# Altium PCB FlexiGlow_Rev_A.PcbDoc
Units mm, origin at the board's own origin, x right, y up, seen from the top; angles counter-clockwise.
Board outline 31.38 x 28.52 mm, 2 copper layers (Top Layer, Bottom Layer), stack 0.252 mm thick; 46 components, 33 nets, 142 pads, 73 vias.
Unrouted connection lines stored in the file: 4.
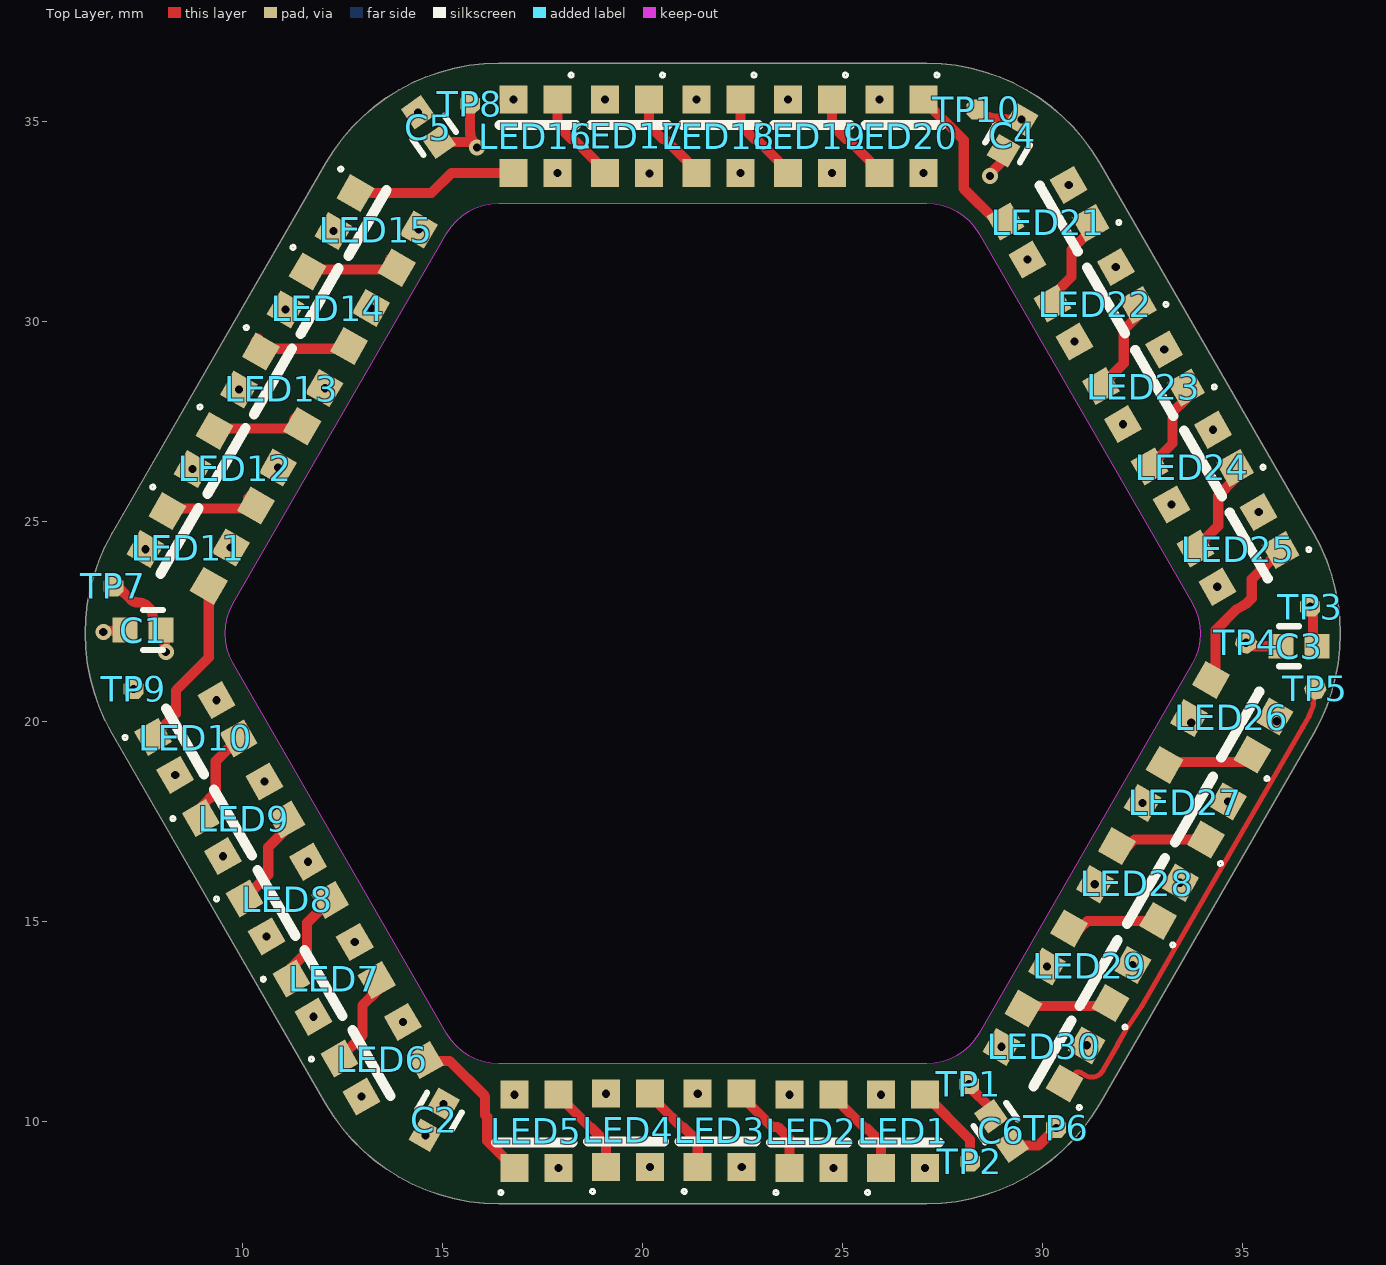
[diagram p0: Top Layer view]
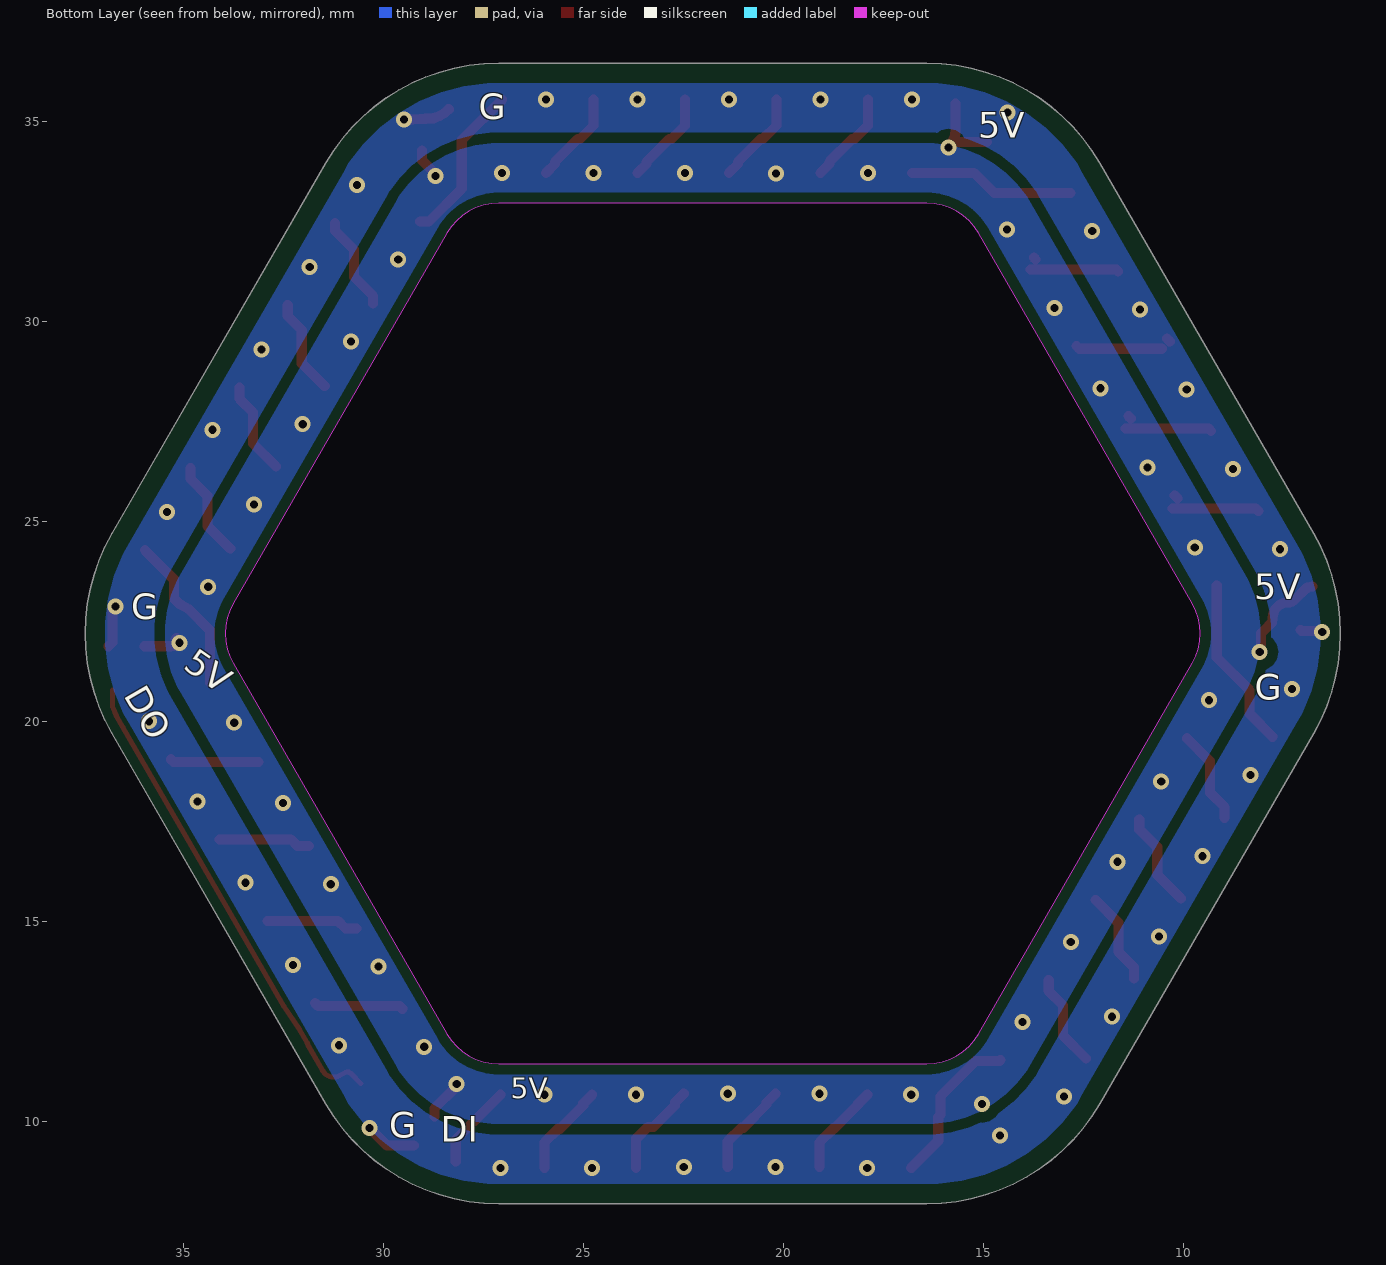
[diagram p1: Bottom Layer view, seen from below]
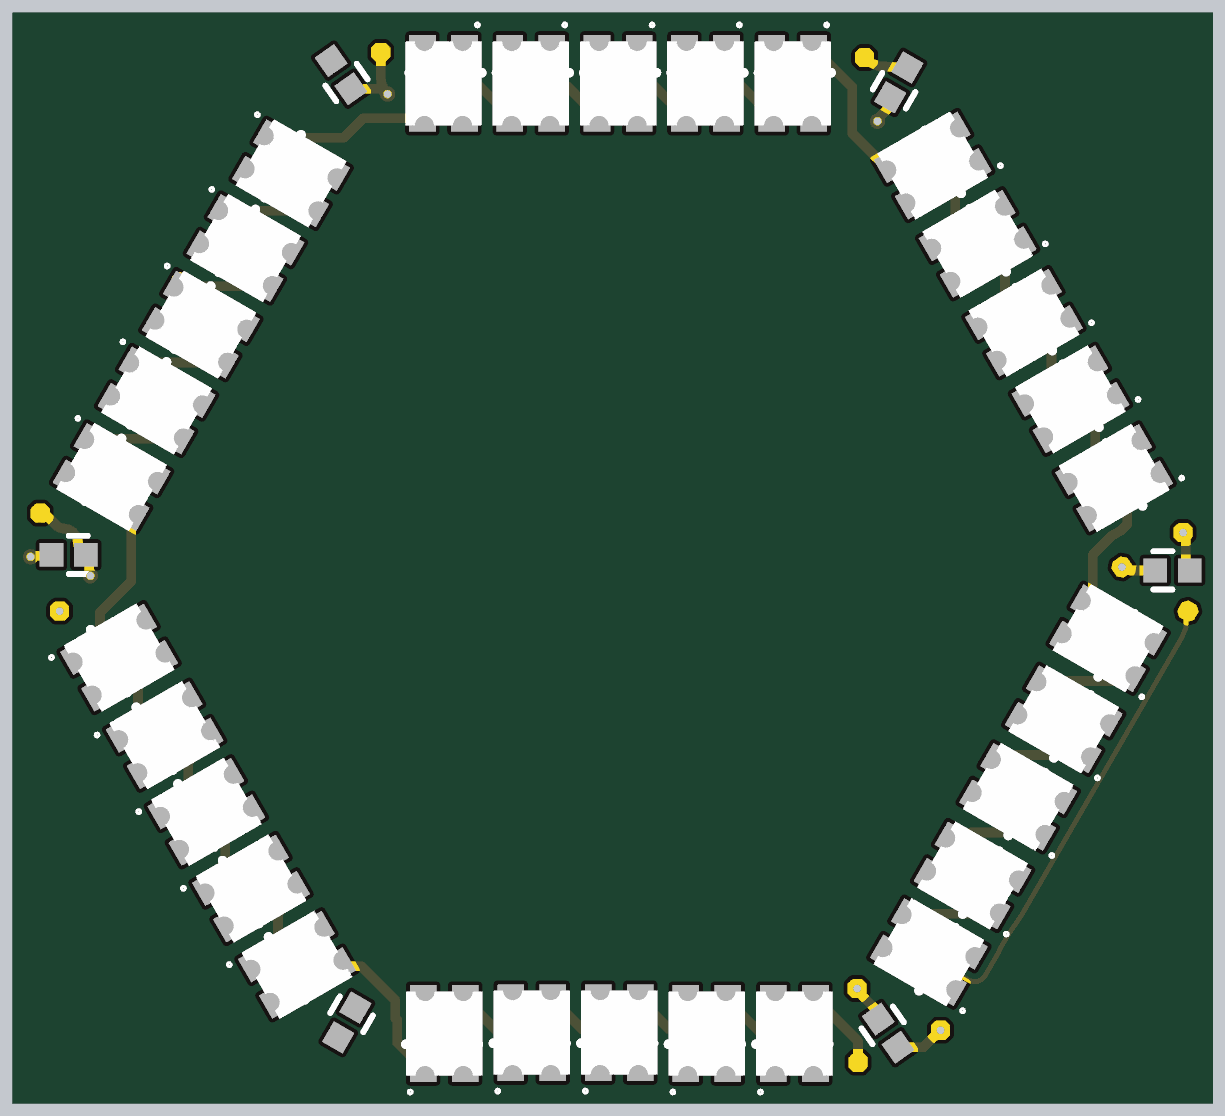
[diagram p2: 3D render of the assembled board from above, using the file's embedded part models]

## Layer stack, top to bottom
Top Coverlay: solder mask 0.0254, SM-002, Dk 4
Adhesive 1: prepreg 0.0254, PP-006, Dk 4.1
Top Layer: signal copper 0.018
Adhesive 2: prepreg 0.02, PP-006, Dk 4.1
PI  1: prepreg 0.025, Composite dielectric, Dk 4.1
Adhesive 3: prepreg 0.02, PP-006, Dk 4.1
Bottom Layer: signal copper 0.018
Adhesive 4: prepreg 0.0254, PP-006, Dk 4.1
Bottom Solder: solder mask 0.0254, SM-002, Dk 4
Stiffener 1: core 0.1, Core-009, Dk 4.5

## Board outline
6.747,19.689 cw(c11.077,22.189) 6.747,24.689 12.092,33.948 cw(c16.422,31.448) 16.422,36.448 27.113,36.448 cw(c27.113,31.448) 31.443,33.948 36.788,24.689 cw(c32.458,22.189) 36.788,19.689 31.443,10.431 cw(c27.113,12.931) 27.113,7.931 16.422,7.931 cw(c16.422,12.931) 12.092,10.431
cut-out: 9.778,21.439 cw(c11.077,22.189) 9.778,22.939 15.123,32.198 cw(c16.422,31.448) 16.422,32.948 27.113,32.948 cw(c27.113,31.448) 28.412,32.198 33.757,22.939 cw(c32.458,22.189) 33.757,21.439 28.412,12.181 cw(c27.113,12.931) 27.113,11.431 16.422,11.431 cw(c16.422,12.931) 15.123,12.181

## Design rules (kind name [scope] priority, off if disabled: settings)
BoardOutlineClearance [All] p1: gap=0.25 ignorepadtopadclearanceinfootprint=FALSE
Clearance [All] p1: gap=0.254 ignorepadtopadclearanceinfootprint=FALSE except(0: Arc-Hole Track-Hole SMDPad-Hole THPad-Hole Via-Hole Fill-Hole Poly-Hole Region-Hole Text-Hole)
HoleSize [IsVia] p1: absolutevalues=TRUE maxlimit=2.54 minlimit=0.2 maxpercent=80.000 minpercent=20.000
HoleToHoleClearance [All] p1: gap=0.1 allowstackedmicrovias=TRUE
PolygonConnect [All] p1: connectstyle=Direct reliefconductorwidth=0.254 reliefentries=4 polygonreliefangle="90 Angle" airgapwidth=0.254
RoutingVias [All] p1: holewidth=0.711 width=1.27 viastyle="Through Hole" minholewidth=0.203 minwidth=0.305 maxholewidth=0.711 maxwidth=1.27
SilkToSolderMaskClearance [IsPad] p1: minsilkscreentomaskgap=0 clearancetoexposedcopper=TRUE
SolderMaskExpansion [All] p1: expansion=0.102 istentingtop=FALSE
SupplyNets "Schematic Supply Nets_1" [InNet('GND')] p1: voltage=0.000
SupplyNets "Schematic Supply Nets" [InNet('5V')] p2: voltage=0.000
Width [All] p1: maxlimit=2.54 minlimit=0.076 preferedwidth=0.254
27 further rules are at their usual default settings.

## Components (designator, comment, footprint, x,y, rotation, side; value= is the part's Value field where it differs from the comment)
C1 "4.7uF" CAPC0402(1005)_N 7.526,22.276 r180 top
C2 "4.7uF" CAPC0402(1005)_N 14.808,10.033 r240 top
C3 "4.7uF" CAPC0402(1005)_N 36.424,21.869 r0 top
C4 "4.7uF" CAPC0402(1005)_N 29.261,34.646 r60 top
C5 "4.7uF" CAPC0402(1005)_N 14.656,34.849 r125 top
C6 "4.7uF" CAPC0402(1005)_N 28.981,9.754 r305 top
LED1 "WS2812C-2020" WS2812C-2020 26.423,9.764 r270 top
LED2 "WS2812C-2020" WS2812C-2020 24.131,9.764 r270 top
LED3 "WS2812C-2020" WS2812C-2020 21.838,9.79 r270 top
LED4 "WS2812C-2020" WS2812C-2020 19.546,9.79 r270 top
LED5 "WS2812C-2020" WS2812C-2020 17.254,9.764 r270 top
LED6 "WS2812C-2020" WS2812C-2020 13.469,11.644 r210 top
LED7 "WS2812C-2020" WS2812C-2020 12.266,13.642 r210 top
LED8 "WS2812C-2020" WS2812C-2020 11.098,15.649 r210 top
LED9 "WS2812C-2020" WS2812C-2020 10.006,17.655 r210 top
LED10 "WS2812C-2020" WS2812C-2020 8.812,19.687 r210 top
LED11 "WS2812C-2020" WS2812C-2020 8.719,24.395 r150 top
LED12 "WS2812C-2020" WS2812C-2020 9.897,26.398 r150 top
LED13 "WS2812C-2020" WS2812C-2020 11.056,28.383 r150 top
LED14 "WS2812C-2020" WS2812C-2020 12.225,30.389 r150 top
LED15 "WS2812C-2020" WS2812C-2020 13.418,32.345 r150 top
LED16 "WS2812C-2020" WS2812C-2020 17.443,34.599 r90 top
LED17 "WS2812C-2020" WS2812C-2020 19.729,34.599 r90 top
LED18 "WS2812C-2020" WS2812C-2020 22.015,34.599 r90 top
LED19 "WS2812C-2020" WS2812C-2020 24.301,34.599 r90 top
LED20 "WS2812C-2020" WS2812C-2020 26.587,34.599 r90 top
LED21 "WS2812C-2020" WS2812C-2020 30.182,32.37 r30 top
LED22 "WS2812C-2020" WS2812C-2020 31.36,30.321 r30 top
LED23 "WS2812C-2020" WS2812C-2020 32.57,28.256 r30 top
LED24 "WS2812C-2020" WS2812C-2020 33.789,26.249 r30 top
LED25 "WS2812C-2020" WS2812C-2020 34.932,24.192 r30 top
LED26 "WS2812C-2020" WS2812C-2020 34.671,20.015 r330 top
LED27 "WS2812C-2020" WS2812C-2020 33.51,17.892 r330 top
LED28 "WS2812C-2020" WS2812C-2020 32.316,15.86 r330 top
LED29 "WS2812C-2020" WS2812C-2020 31.122,13.803 r330 top
LED30 "WS2812C-2020" WS2812C-2020 29.979,11.796 r330 top
TP1 "5V" TestPoint-Micro 28.169,10.922 r90 top
TP2 "DI" TestPoint-Micro 28.194,8.992 r90 top
TP3 "G" TestPoint-Micro 36.703,22.86 r270 top
TP4 "5V" TestPoint-Micro 35.103,21.957 r35 top
TP5 "DO" TestPoint-Micro 36.83,20.803 r150 top
TP6 "G" TestPoint-Micro 30.353,9.83 r90 top
TP7 "5V" TestPoint-Micro 6.782,23.368 r90 top
TP8 "5V" TestPoint-Micro 15.697,35.433 r90 top
TP9 "G" TestPoint-Micro 7.29,20.803 r90 top
TP10 "G" TestPoint-Micro 28.367,35.295 r90 top

## Footprints (in the part's own frame and the unit in brackets; to place one, negate y for a bottom-side part, rotate by r counter-clockwise, add the part's x,y. Pads: shape width x height; smd on the part's side, far side on the other; paste and mask are expansions set on the pad)
CAPC0402(1005)_N [mm] "Chip Capacitor, Body 1.0x0.5mm, Height 0.7mm, IPC Medium Density"
  rect 0.62x0.62 smd: 1(-0.45,0) 2(0.45,0)
  silkscreen extent -0.5,-0.5 0,0.5, body extent -0.55,-0.3 0.55,0.3, height 0.7
TestPoint-Micro [mm] "Test Point - Top Pad Only"
  oct 0.5x0.5 smd paste-1.016: 1(0,0)
WS2812C-2020 [mm] "neopixel"
  rect 0.7x0.7 smd: 1(0.936,-0.447) 2(0.936,0.653) 3(-0.894,0.653) 4(-0.894,-0.447)
  silkscreen extent 0.3,-0.9 1.6,1, body extent -1.08,-0.9 1.12,1.1, height 0.84

## Part data
C1 C2 C3 C4 C5 C6: library part "CAP CER 4.7UF 6.3V 10% X5R 0402", "4.7uF 0402", Capacitance=4.7µF, Manufacturer="Murata Electronics North America", Manufacturer Part Number=GRM155R60J475ME47D, Operating Temperature="-55°C ~ 85°C", Package / Case=0402, Ratings=-, Supplier Part Number 1=490-5915-1-ND, Temperature Coefficient=X5R, Tolerance=±20%, Voltage - Rated=6.3V, Applications="General Purpose", Category=Capacitors, ComponentLink1Description=http://www.murata.com/~/media/webrenewal/support/library/catalog/products/capacitor/mlcc/c02e.ashx, ComponentLink1URL=http://www.murata.com/~/media/webrenewal/support/library/catalog/products/capacitor/mlcc/c02e.ashx, Features=-, Height - Seated (Max)=-, Lead Spacing=-, Lead Style=-, Mounting Type="Surface Mount, MLCC", Packaging="Cut Tape (CT)", Pricing 1="1=0.15, 10=0.1, 50=0.0576, 100=0.0475, 250=0.04, 500=0.0335, 1000=0.0275, 5000=0.02325 (USD)", RoHS="RoHS Compliant", Size / Dimension="0.039\" L x 0.020\" W (1.00mm x 0.50mm)", Stock 1=162576, Supplier 1=Digi-Key, Thickness (Max)="0.024\" (0.60mm)"
LED1 LED2 LED3 LED4 LED5 LED6 LED7 LED8 LED9 LED10 LED11 LED12 LED13 LED14 LED15 LED16 LED17 LED18 LED19 LED20 LED21 LED22 LED23 LED24 LED25 LED26 LED27 LED28 LED29 LED30: "Neopixel"
TP1 TP2 TP3 TP4 TP5 TP6 TP7 TP8 TP9 TP10: library part "TestPoint, small", "Test Point"

## Via types
v1: diameter 0.4, hole 0.203, Top Layer to Bottom Layer, tented both sides, 73 vias

## Nets (pads, with @x,y where several pads share a name; then routed paths per layer and width w, separated by ;. In a path a pad name is that pad's centre, name@x,y a point inside that pad or via, vN(x,y) a via of type N, cw(c..) or ccw(c..) an arc to the next point about the centre after c; other vN are vias at no path point)
5V: C1.1 C2.1 C3.1 C4.1 C5.1 C6.1 LED1.4 LED2.4 LED3.4 LED4.4 LED5.4 LED6.4 LED7.4 LED8.4 LED9.4 LED10.4 LED11.4 LED12.4 LED13.4 LED14.4 LED15.4 LED16.4 LED17.4 LED18.4 LED19.4 LED20.4 LED21.4 LED22.4 LED23.4 LED24.4 LED25.4 LED26.4 LED27.4 LED28.4 LED29.4 LED30.4 TP1.1 TP4.1 TP7.1 TP8.1 | length 7.2
  Top Layer w0.254: TP7.1 6.905,23.334 cw(c6.778,23.114) 6.958,23.294 7.211,23.04 ccw(c7.39,23.221) 7.387,22.967 cw(c7.386,22.586) 7.762,22.648 7.793,22.459 C1.1 8.065,22.186 8.065,21.755 v1(8.093,21.727) ; C5.1 15.696,34.48 15.835,34.341 v1(15.875,34.341) cw(c16.304,34.77) 15.697,34.77 TP8.1 ; v1(28.169,10.922) 28.169,10.871 28.723,10.317 C6.1 ; v1(28.702,33.63) 28.73,33.658 28.73,33.714 29.036,34.02 C4.1 ; v1(35.103,21.957) ccw(c35.314,22.168) 35.314,21.869 C3.1 ; TP4.1@35.179,22.073 TP4.1@35.199,22.053
  other v1: 15.033,10.423 16.807,10.659 23.684,10.659 25.976,10.659 19.099,10.684 21.392,10.684 28.981,11.857 14.02,12.478 30.124,13.863 12.818,14.476 31.318,15.921 11.649,16.483 32.512,17.953 10.557,18.489 33.731,19.959 9.363,20.521 34.381,23.357 9.717,24.334 33.238,25.415 10.895,26.338 32.019,27.421 12.074,28.319 30.809,29.487 13.223,30.329 29.631,31.536 14.416,32.285 20.189,33.685 17.889,33.705 22.461,33.705 24.747,33.705 27.033,33.705
Din: LED1.3 TP2.1 | length 2.1
  Top Layer w0.254: LED1.3 28.194,9.541 TP2.1
Dout: LED30.1 TP5.1 | length 12.1
  Top Layer w0.127: LED30.1 30.814,11.189 cw(c30.903,11.099) 30.966,11.209 31.086,11.141 ccw(c31.244,11.416) 31.519,11.257 31.869,11.864 ccw(c31.594,12.022) 31.9,11.936 cw(c32.022,11.901) 31.912,11.964 32.104,12.298 cw(c32.214,12.234) 32.109,12.305 32.485,12.864 ccw(c32.38,12.935) 32.49,12.872 34.345,16.085 36.516,19.846 ; 36.517,19.846 36.666,20.105 ccw(c36.556,20.169) 36.673,20.12 36.77,20.352 ccw(c36.652,20.4) 36.779,20.4 TP5.1@36.779,20.777
GND: C1.2 C2.2 C3.2 C4.2 C5.2 C6.2 LED1.2 LED2.2 LED3.2 LED4.2 LED5.2 LED6.2 LED7.2 LED8.2 LED9.2 LED10.2 LED11.2 LED12.2 LED13.2 LED14.2 LED15.2 LED16.2 LED17.2 LED18.2 LED19.2 LED20.2 LED21.2 LED22.2 LED23.2 LED24.2 LED25.2 LED26.2 LED27.2 LED28.2 LED29.2 LED30.2 TP3.1 TP6.1 TP9.1 TP10.1 | length 4.1
  Top Layer w0.254: v1(6.531,22.225) 6.556,22.25 7.05,22.25 C1.2 ; TP10.1 28.472,35.205 ccw(c28.993,35.92) 28.718,35.079 ccw(c28.796,35.321) 28.785,35.067 28.941,35.06 cw(c28.922,34.679) 28.95,35.059 29.274,35.035 v1(29.486,35.035) ; C6.2 29.908,9.385 v1(30.353,9.83) ; v1(36.703,22.86) 36.775,22.788 36.775,21.968 C3.2
  other v1: 17.907,8.829 24.784,8.829 27.076,8.829 20.199,8.854 22.492,8.854 14.583,9.643 12.985,10.61 31.116,11.894 11.783,12.609 32.259,13.901 10.614,14.615 33.453,15.958 9.522,16.622 34.647,17.99 8.328,18.654 35.866,19.997 7.29,20.803 7.582,24.297 35.416,25.225 8.76,26.3 34.273,27.282 9.919,28.285 33.054,29.289 11.088,30.291 31.843,31.355 12.281,32.247 30.666,33.404 14.398,35.217 16.789,35.535 19.075,35.535 21.361,35.535 23.647,35.535 25.933,35.535
NetLED1_1: LED1.1 LED2.3 | length 2.4
  Top Layer w0.254: LED2.3 25.007,10.436 25.007,10.389 25.588,9.809 25.634,9.809 25.976,9.466 LED1.1
NetLED2_1: LED2.1 LED3.3 | length 2.4
  Top Layer w0.254: LED3.3 22.715,10.461 22.715,10.389 23.249,9.855 23.388,9.855 23.684,9.56 LED2.1
NetLED3_1: LED3.1 LED4.3 | length 2.4
  Top Layer w0.254: LED4.3 20.422,10.461 20.422,10.415 21.003,9.834 21.049,9.834 21.392,9.492 LED3.1
NetLED4_1: LED4.1 LED5.3 | length 2.3
  Top Layer w0.254: LED5.3 18.13,10.436 18.13,10.415 18.723,9.821 18.744,9.821 19.099,9.466 LED4.1
NetLED6_1: LED6.1 LED7.3 | length 2.3
  Top Layer w0.254: LED6.1 13.008,12.136 13.008,12.888 13.368,13.248 LED7.3
NetLED7_1: LED7.1 LED8.3 | length 2.4
  Top Layer w0.254: LED7.1 11.233,13.837 11.627,14.231 11.627,14.958 LED8.3
NetLED8_1: LED8.1 LED9.3 | length 2.4
  Top Layer w0.254: LED8.1 10.655,16.158 10.655,16.844 11.107,17.297 LED9.3
NetLED9_1: LED9.1 LED10.3 | length 2.4
  Top Layer w0.254: LED9.1 8.972,17.85 9.341,18.218 9.341,18.996 LED10.3
NetLED11_1: LED11.1 LED12.3 | length 2.3
  Top Layer w0.254: LED11.1 8.2,25.317 LED12.3@10.277,25.317 ; LED12.3@10.15,25.571 LED12.3@10.218,25.639
NetLED12_1: LED12.1 LED13.3 | length 2.2
  Top Layer w0.254: LED12.1 9.368,27.311 LED13.3@11.446,27.311 ; LED13.3@11.319,27.565 LED13.3@11.377,27.624
NetLED13_1: LED13.1 LED14.3 | length 2.3
  Top Layer w0.254: LED13.1@10.342,29.491 LED13.1@10.412,29.561 ; LED13.1@10.539,29.307 12.603,29.307 LED14.3
NetLED14_1: LED14.1 LED15.3 | length 2.3
  Top Layer w0.254: LED14.1 11.682,31.288 LED15.3@13.822,31.288 ; LED15.3@13.695,31.542 LED15.3@13.739,31.586
NetLED16_1: LED16.1 LED17.3 | length 2.4
  Top Layer w0.254: LED16.1 17.889,34.891 18.228,34.552 18.281,34.552 18.852,33.98 18.852,33.928 LED17.3
NetLED17_1: LED17.1 LED18.3 | length 2.4
  Top Layer w0.254: LED17.1 20.175,34.891 20.514,34.552 20.567,34.552 21.138,33.98 21.138,33.928 LED18.3
NetLED18_1: LED18.1 LED19.3 | length 2.4
  Top Layer w0.254: LED18.1 22.461,34.891 22.8,34.552 22.853,34.552 23.424,33.98 23.424,33.928 LED19.3
NetLED19_1: LED19.1 LED20.3 | length 2.4
  Top Layer w0.254: LED19.1 24.747,34.891 25.086,34.552 25.139,34.552 25.71,33.98 25.71,33.928 LED20.3
NetLED21_1: LED21.1 LED22.3 | length 2.4
  Top Layer w0.254: LED22.3 30.259,30.628 30.737,31.106 30.737,31.785 31.216,32.264 LED21.1
NetLED22_1: LED22.1 LED23.3 | length 2.4
  Top Layer w0.254: LED23.3 32.041,28.947 32.041,29.775 32.393,30.127 LED22.1
NetLED23_1: LED23.1 LED24.3 | length 2.3
  Top Layer w0.254: LED24.3 33.26,26.94 33.26,27.718 33.604,28.061 LED23.1
NetLED24_1: LED24.1 LED25.3 | length 2.4
  Top Layer w0.254: LED25.3 34.403,24.883 34.403,25.635 34.823,26.054 LED24.1
NetLED26_1: LED26.1 LED27.3 | length 2.2
  Top Layer w0.254: LED27.3@33.131,18.975 35.246,18.975 LED26.1@35.316,19.044
NetLED27_1: LED27.1 LED28.3 | length 2.3
  Top Layer w0.254: LED28.3 32.144,16.873 32.308,17.038 LED27.1
NetLED28_1: LED28.1 LED29.3 | length 2.3
  Top Layer w0.254: LED29.3 30.95,14.816 31.14,15.006 LED28.1
NetLED29_1: LED29.1 LED30.3 | length 2.2
  Top Layer w0.254: LED30.3 29.601,12.879 31.64,12.879 LED29.1
P1: LED5.1 LED6.3 | length 4
  Top Layer w0.254: LED6.3 14.59,11.506 15.188,11.506 16.076,10.617 16.076,10.151 16.129,10.098 16.129,9.507 LED5.1
P2: LED10.1 LED11.3 | length 4.4
  Top Layer w0.254: LED10.1 7.778,19.615 8.347,20.183 8.347,20.767 9.167,21.588 LED11.3
P3: LED15.1 LED16.3 | length 4.2
  Top Layer w0.254: LED15.1 14.734,33.2 15.238,33.705 LED16.3
P4: LED20.1 LED21.3 | length 4
  Top Layer w0.254: LED20.1 28.042,34.526 28.042,33.311 28.864,32.489 LED21.3
P5: LED25.1 LED26.3 | length 4
  Top Layer w0.254: LED26.3@34.339,20.97 34.339,22.274 34.848,22.783 35.093,22.924 35.24,23.071 35.24,23.547 LED25.1

## Polygon pours and split planes (outlines as drawn)
GND on Bottom Layer "Bottom Layer-GND" (solid, pour order 6): 12.525,10.681 7.18,19.939 cw(c11.077,22.189) 7.18,24.439 12.525,33.698 cw(c16.422,31.448) 16.422,35.948 27.106,35.948 cw(c27.113,31.448) 31.01,33.698 36.355,24.439 cw(c32.458,22.189) 36.355,19.939 31.01,10.681 cw(c27.113,12.931) 27.113,8.431 16.422,8.431 cw(c16.422,12.931)
5V on Bottom Layer "Bottom Layer-5V" (solid, pour order 5): 13.824,11.431 8.479,20.689 cw(c11.077,22.189) 8.479,23.689 13.824,32.948 cw(c16.422,31.448) 16.422,34.448 27.113,34.448 cw(c27.113,31.448) 29.711,32.948 35.056,23.689 cw(c32.458,22.189) 35.056,20.689 29.711,11.431 cw(c27.113,12.931) 27.113,9.931 16.422,9.931 cw(c16.422,12.931)

## Other copper
Top Layer:
  text "Top Layer" at 17.12,5.435 h1.02
Bottom Layer:
  text "Bottom" at 17.12,3.845 h1.02

## Silkscreen, mask and mechanical layers (free items; w line width, h text height)
Top Overlay:
  text "Top Overlay" at 17.12,1.917 h1.02
Board Layer Stack Bottom Overlay:
  text "Bottom Overlay" at 17.12,-0.011 h1.02
Mechanical 1:
  drawing of 421 lines, arcs and shapes, not listed
  text "Layer" at 6.367,104.546 h1.52
  text "Name" at 16.779,104.546 h1.52
  text "Material" at 67.564,104.546 h1.52
  text "Thickness" at 99.558,104.546 h1.52
  text "Constant" at 116.064,104.546 h1.52
  text "Board Layer Stack" at 130.539,104.546 h1.52
  text "Top Overlay" at 16.779,101.498 h1.52
  text "Top Coverlay" at 16.779,98.45 h1.52
  text "SM-002" at 67.564,98.45 h1.52
  text "0.025mm" at 99.558,98.45 h1.52
  text "4" at 116.064,98.45 h1.52
  text "Adhesive 1" at 16.779,95.402 h1.52
  text "PP-006" at 67.564,95.402 h1.52
  text "0.025mm" at 99.558,95.402 h1.52
  text "4.1" at 116.064,95.402 h1.52
  text "Top Surface Finish" at 16.779,92.354 h1.52
  text "Nickel, Gold" at 67.564,92.354 h1.52
  text "0.006mm" at 99.558,92.354 h1.52
  text "1" at 6.367,89.306 h1.52
  text "Top Layer" at 16.779,89.306 h1.52
  text "CF-004" at 67.564,89.306 h1.52
  text "0.018mm" at 99.558,89.306 h1.52
  text "Adhesive 2" at 16.779,86.258 h1.52
  text "PP-006" at 67.564,86.258 h1.52
  text "0.020mm" at 99.558,86.258 h1.52
  text "4.1" at 116.064,86.258 h1.52
  text "PI  1" at 16.779,83.21 h1.52
  text "Composite dielectric" at 67.564,83.21 h1.52
  text "0.025mm" at 99.558,83.21 h1.52
  text "4.1" at 116.064,83.21 h1.52
  text "Adhesive 3" at 16.779,80.162 h1.52
  text "PP-006" at 67.564,80.162 h1.52
  text "0.020mm" at 99.558,80.162 h1.52
  text "4.1" at 116.064,80.162 h1.52
  text "2" at 6.367,77.114 h1.52
  text "Bottom Layer" at 16.779,77.114 h1.52
  text "CF-004" at 67.564,77.114 h1.52
  text "0.018mm" at 99.558,77.114 h1.52
  text "Bottom Surface Finish" at 16.779,74.066 h1.52
  text "Nickel, Gold" at 67.564,74.066 h1.52
  text "0.006mm" at 99.558,74.066 h1.52
  text "Adhesive 4" at 16.779,71.018 h1.52
  text "PP-006" at 67.564,71.018 h1.52
  text "0.025mm" at 99.558,71.018 h1.52
  text "4.1" at 116.064,71.018 h1.52
  text "Bottom Solder" at 16.779,67.97 h1.52
  text "SM-002" at 67.564,67.97 h1.52
  text "0.025mm" at 99.558,67.97 h1.52
  text "4" at 116.064,67.97 h1.52
  text "Stiffener 1" at 16.779,64.922 h1.52
  text "Core-009" at 67.564,64.922 h1.52
  text "0.100mm" at 99.558,64.922 h1.52
  text "4.5" at 116.064,64.922 h1.52
  text "Board Layer Stack Bottom Overlay" at 16.779,61.874 h1.52
Stiffiner:
  circle w0.006: c9.333,22.073 r0.003
  circle w0.006: c15.833,33.332 r0.003
  circle w0.006: c28.833,33.332 r0.003
  circle w0.006: c35.333,22.073 r0.003
  circle w0.006: c28.833,10.815 r0.003
  circle w0.006: c9.327,21.96 r0.003
  circle w0.006: c15.827,33.218 r0.003
  circle w0.006: c28.827,33.218 r0.003
  circle w0.006: c35.327,21.96 r0.003
  circle w0.006: c28.827,10.702 r0.003
  lines w0.025: 6.747,19.689 cw(c11.077,22.189) 6.747,24.689 12.092,33.948 cw(c16.422,31.448) 16.422,36.448 27.113,36.448 cw(c27.113,31.448) 31.443,33.948 36.788,24.689 cw(c32.458,22.189) 36.788,19.689 31.443,10.431 cw(c27.113,12.931) 27.113,7.931 16.422,7.931 cw(c16.422,12.931) 12.092,10.431 6.747,19.689 ; 9.778,21.439 cw(c11.077,22.189) 9.778,22.939 15.123,32.198 cw(c16.422,31.448) 16.422,32.948 27.113,32.948 cw(c27.113,31.448) 28.412,32.198 33.757,22.939 cw(c32.458,22.189) 33.757,21.439 28.412,12.181 cw(c27.113,12.931) 27.113,11.431 16.422,11.431 cw(c16.422,12.931) 15.123,12.181 9.778,21.439
  text "Stiffiner" at 17.12,-1.6 h1.02
Drill Drawing:
  lines w0.254: 6.037,113.03 7.73,113.03 7.73,114.723 6.037,114.723 6.037,113.03
  lines w0.381: 4.518,111.887 271.754,111.887 ; 4.518,115.697 271.754,115.697 ; 18.511,108.077 18.511,119.507 ; 32.223,108.077 32.223,119.507 ; 58.631,108.077 58.631,119.507 ; 71.481,108.077 71.481,119.507 ; 90.119,108.077 90.119,119.507 ; 128.208,108.077 128.208,119.507 ; 143.19,108.077 143.19,119.507 ; 162.133,108.077 162.133,119.507 ; 181.178,108.077 181.178,119.507 ; 202.864,108.077 202.864,119.507 ; 236.737,108.077 236.737,119.507 ; 4.518,108.077 271.754,108.077 271.754,119.507 4.518,119.507 4.518,108.077
  text "Symbol" at 6.804,116.84 h1.83
  text "Count" at 19.654,116.84 h1.83
  text "Hole Size" at 33.366,116.84 h1.83
  text "Plated" at 59.774,116.84 h1.83
  text "Hole Type" at 72.624,116.84 h1.83
  text "Drill Layer Pair" at 91.262,116.84 h1.83
  text "Via/Pad" at 129.351,116.84 h1.83
  text "Pad Shape" at 144.333,116.84 h1.83
  text "Template" at 163.276,116.84 h1.83
  text "Description" at 182.321,116.84 h1.83
  text "Hole Tolerance (+)" at 204.007,116.84 h1.83
  text "Hole Tolerance (-)" at 237.88,116.84 h1.83
  text "73" at 19.654,113.03 h1.52
  text "8.00mil (0.203mm)" at 33.366,113.03 h1.52
  text "PTH" at 59.774,113.03 h1.52
  text "Round" at 72.624,113.03 h1.52
  text "Top Layer - Bottom Layer" at 91.262,113.03 h1.52
  text "Via" at 129.351,113.03 h1.52
  text "Rounded" at 144.333,113.03 h1.52
  text "v40h20m0mx0" at 163.276,113.03 h1.52
  text "73 Total" at 19.654,109.22 h1.52